# Altium PCB Mega_pcb.PcbDoc
Units mm, origin at the board's own origin, x right, y up, seen from the top; angles counter-clockwise.
Board outline 100.2 x 100.08 mm, 2 copper layers (Top Layer, Bottom Layer); 30 components, 31 nets, 110 pads, 12 vias.
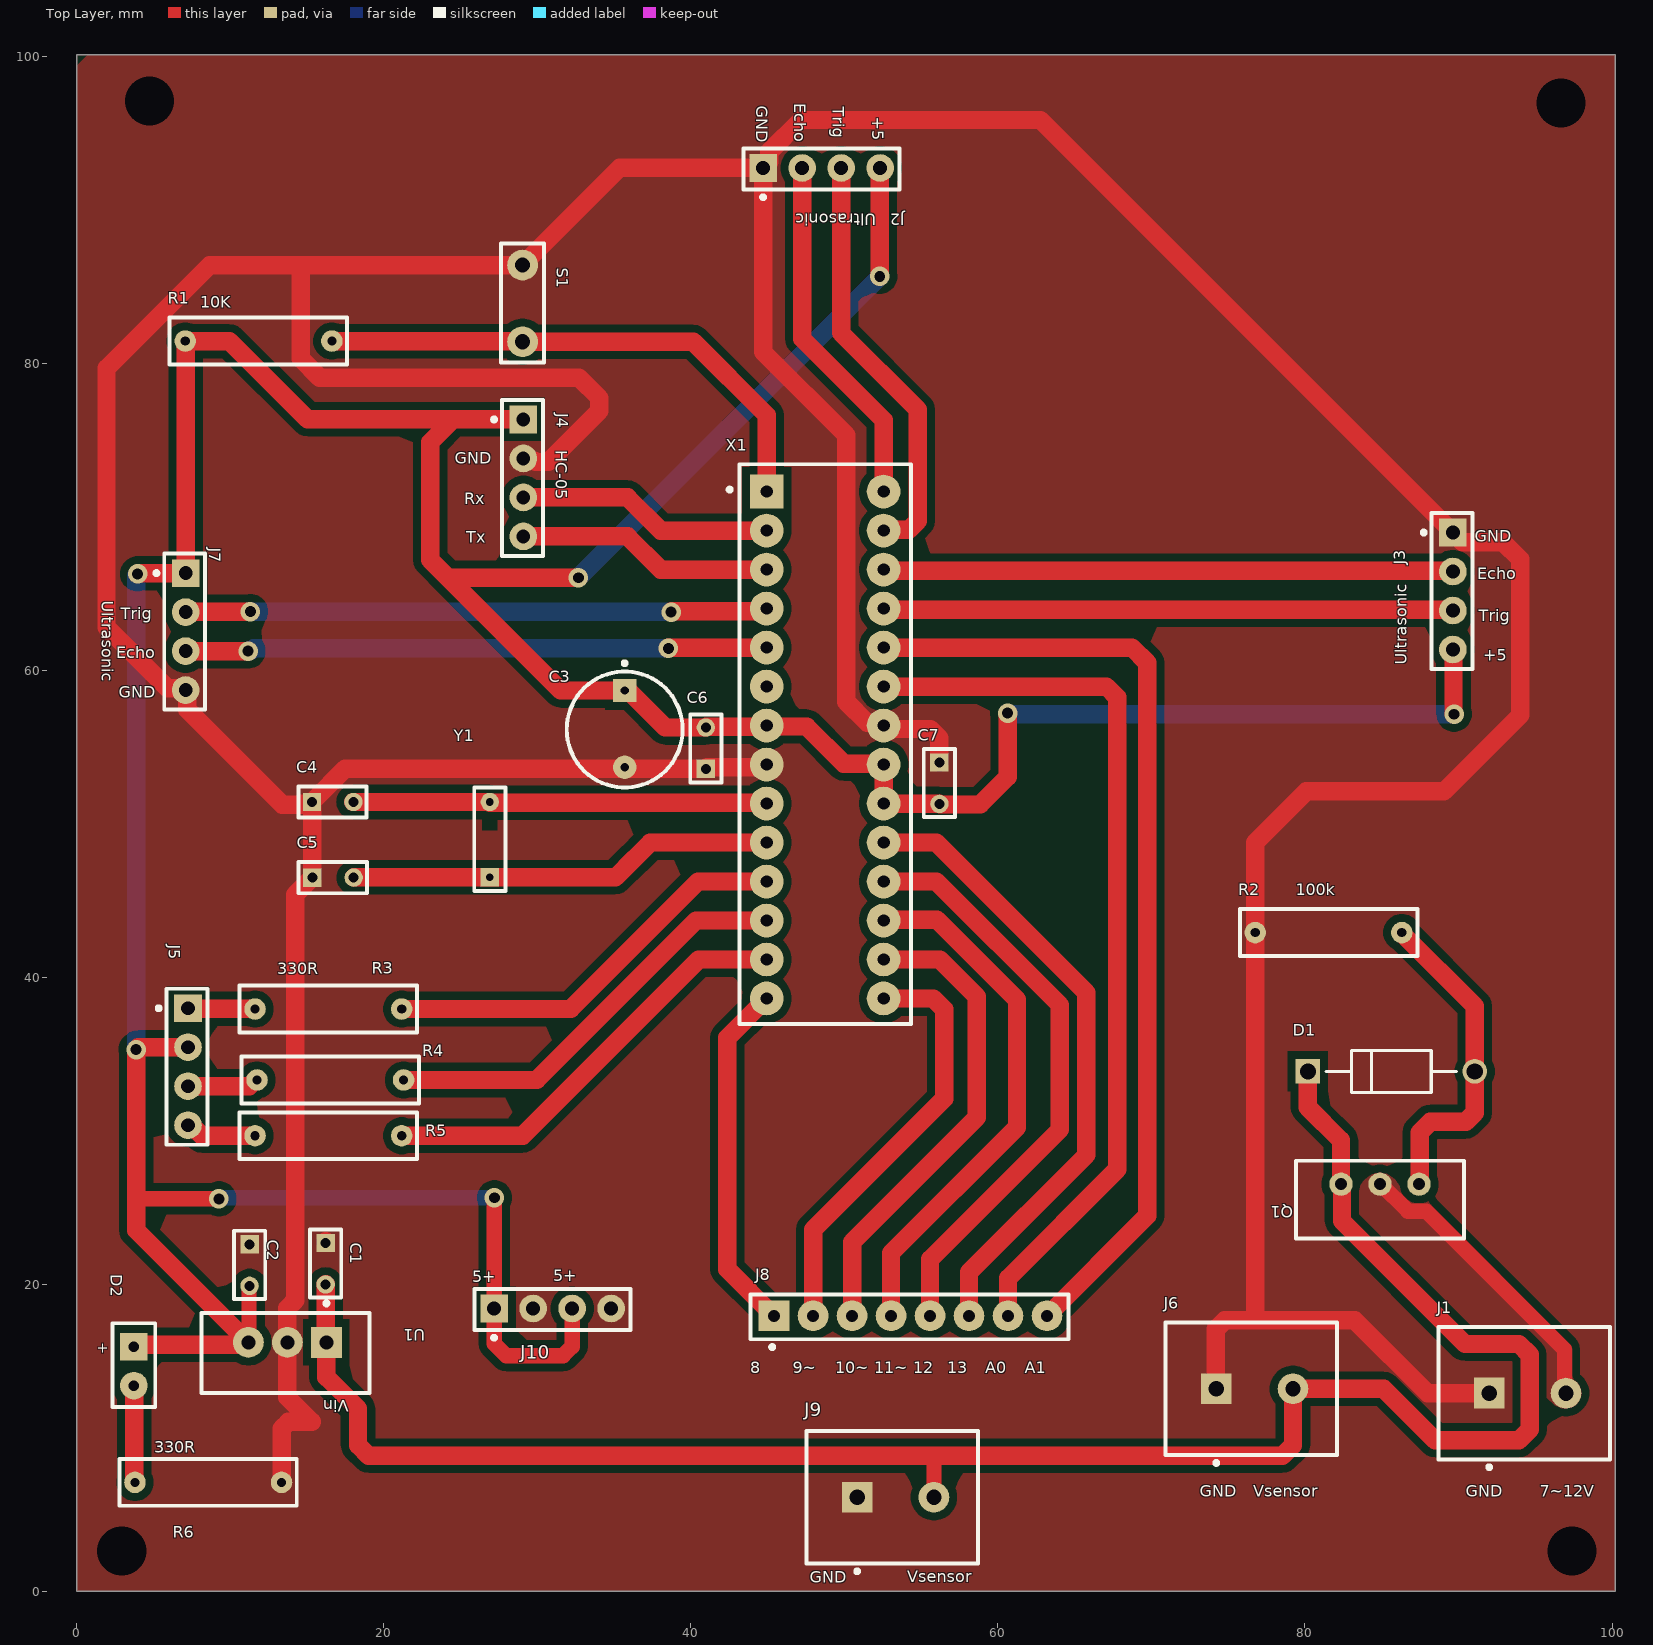
[diagram p0: Top Layer view]
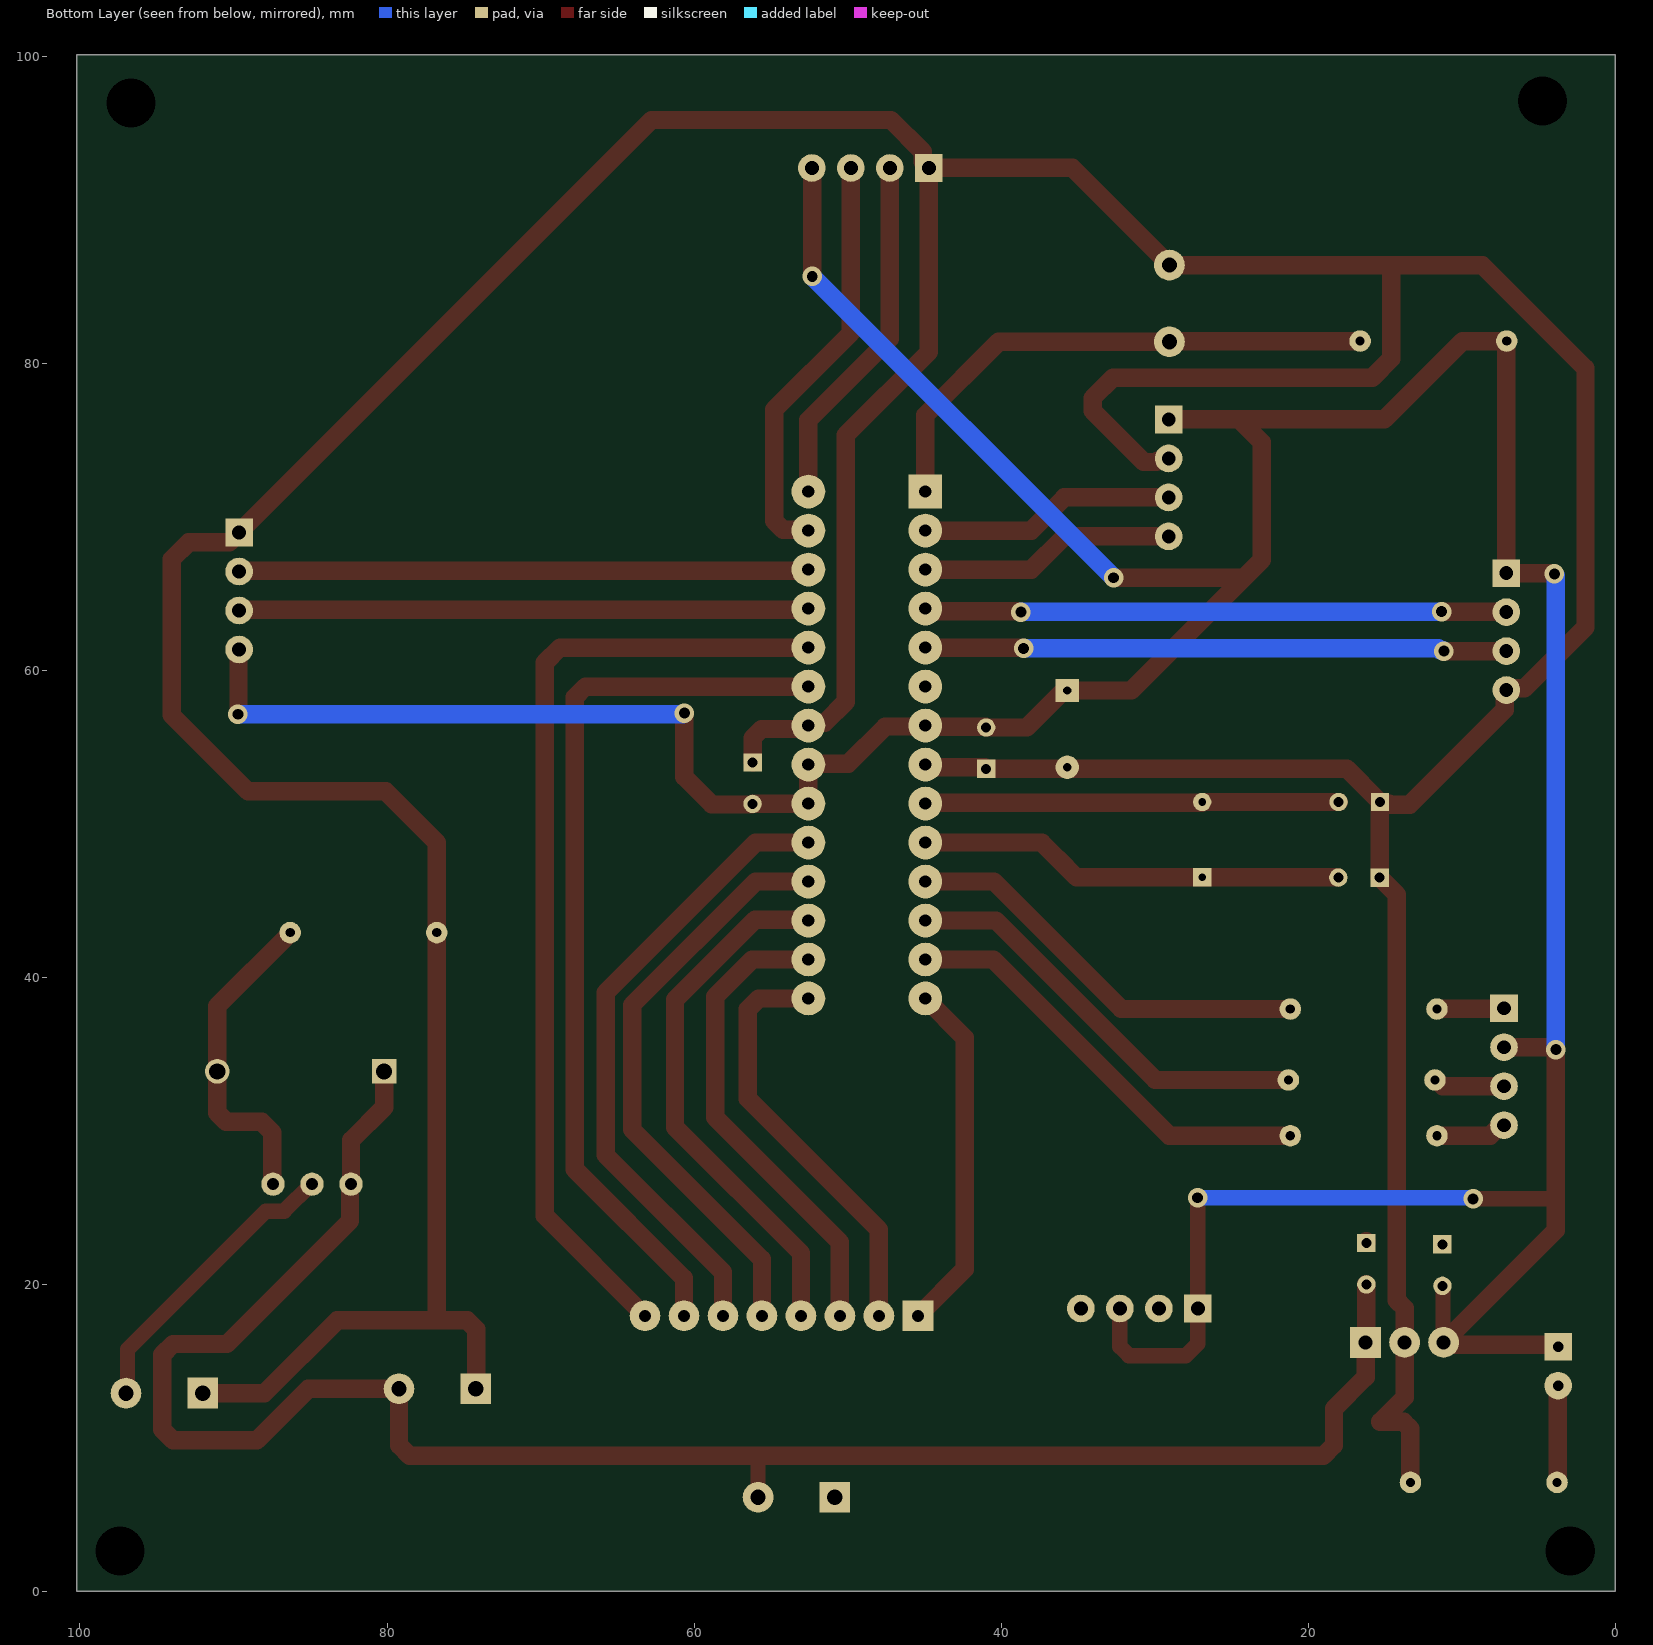
[diagram p1: Bottom Layer view, seen from below]
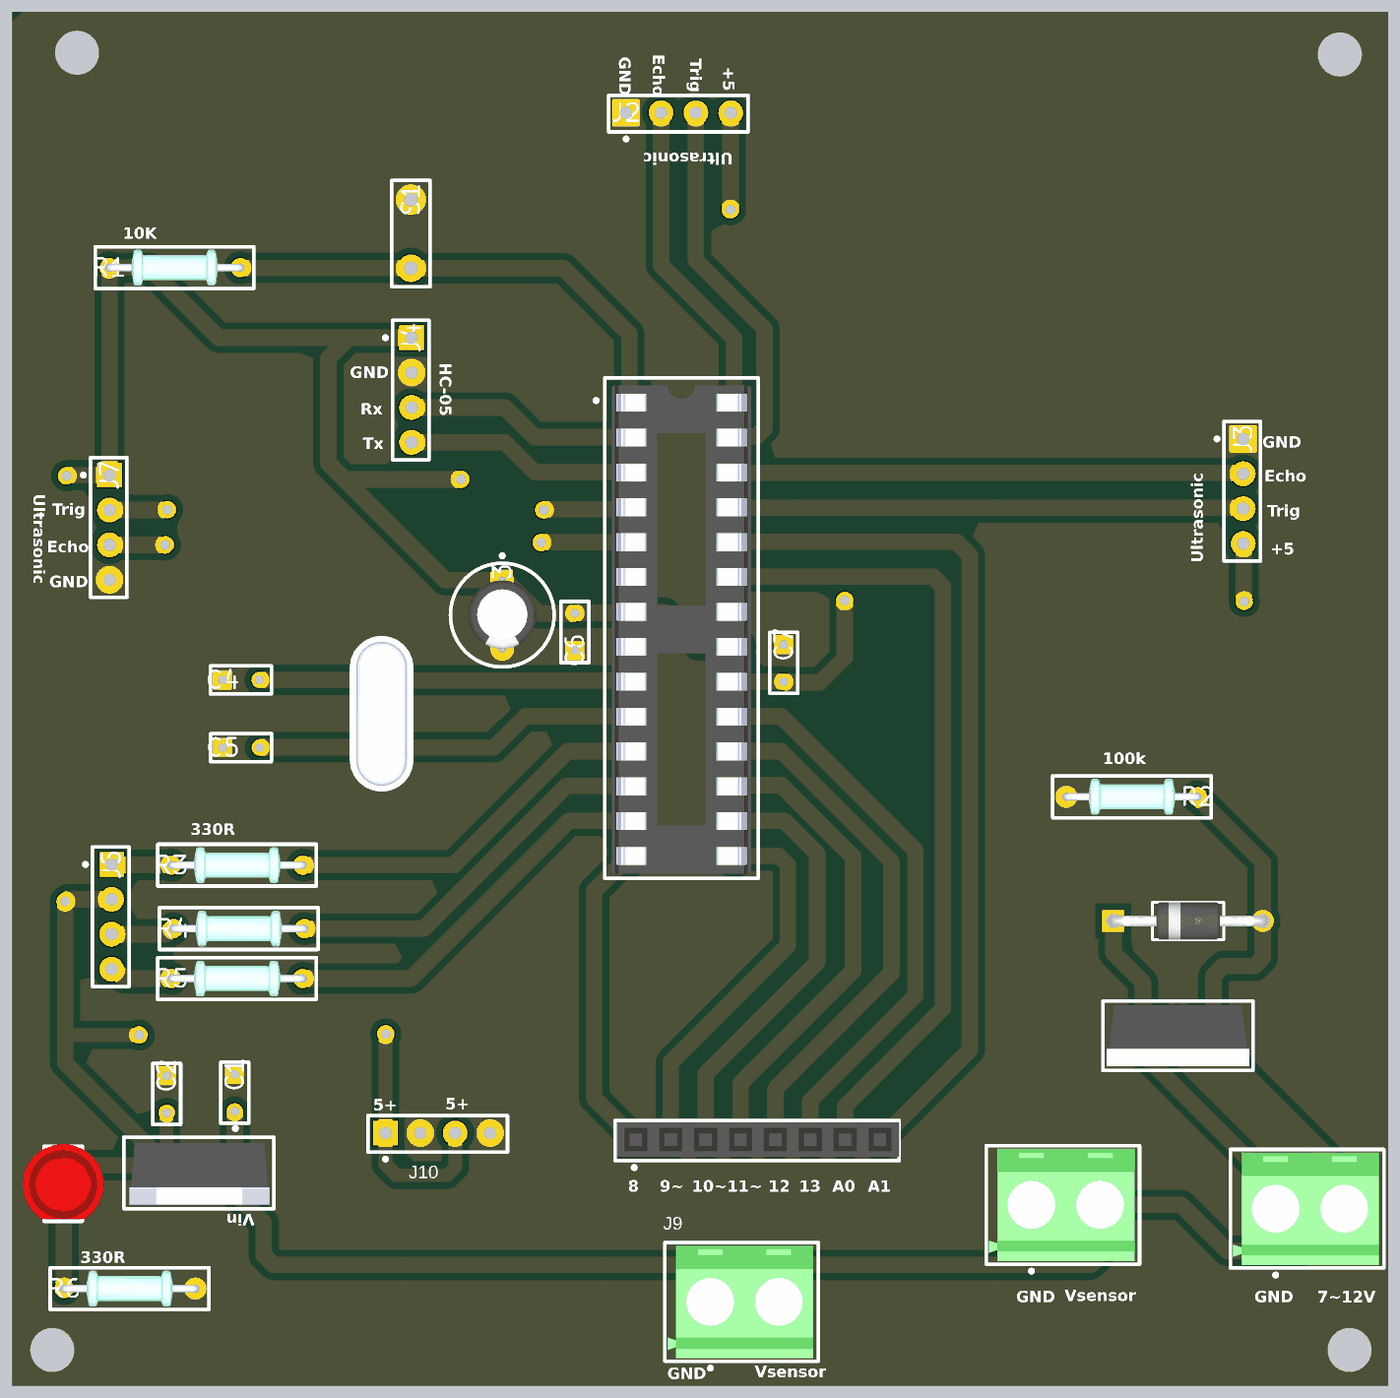
[diagram p2: 3D render of the assembled board from above, using the file's embedded part models]

## Layer stack, top to bottom
Top Solder: solder mask 0.0102, Solder Resist, Dk 3.5
Top Layer: signal copper 0.0356
Dielectric 1: dielectric 0.32, FR-4, Dk 4.8
Bottom Layer: signal copper 0.0356
Bottom Solder: solder mask 0.0102, Solder Resist, Dk 3.5

## Board outline
0,0 100.203,0 100.203,100.076 0,100.076

## Design rules (kind name [scope] priority, off if disabled: settings)
Clearance [All] p1: gap=0.5 ignorepadtopadclearanceinfootprint=TRUE
PlaneConnect [All] p1: planeconnectstyle=Direct reliefexpansion=0.508 reliefentries=4 reliefconductorwidth=0.254 reliefairgap=0.254
PolygonConnect [All] p1: connectstyle=Direct reliefconductorwidth=0.254 reliefentries=4 polygonreliefangle="90 Angle" airgapwidth=0.254
RoutingVias [All] p1: holewidth=0.711 width=1.27 viastyle="Through Hole" minholewidth=0.711 minwidth=1.27 maxholewidth=0.711 maxwidth=1.27
SolderMaskExpansion [All] p1: expansion=0.102 istentingtop=FALSE
SupplyNets "Schematic Supply Nets_16" [InNet('+5')] p1: voltage=0.000
SupplyNets "Schematic Supply Nets_12" [InNet('GND')] p2: voltage=0.000
SupplyNets "Schematic Supply Nets_7" [InNet('Vin')] p3: voltage=0.000
UnRoutedNet [All] p1: checkbadconnections=TRUE
Width [All] p1: maxlimit=1.2 minlimit=1 preferedwidth=1
28 further rules are at their usual default settings.

## Components (designator, comment, footprint, x,y, rotation, side; value= is the part's Value field where it differs from the comment)
C1 "0.33uF" "Capacitor 100nF THT" 16.205,22.682 r270 top
C2 "100nF" "Capacitor 100nF THT" 11.252,22.588 r270 top
C3 "10uF" "Pol cap 10uF" 35.687,58.67 r270 top
C4 "22pF" "Capacitor 22pF THT" 15.316,51.41 r0 top
C5 "22pF" "Capacitor 22pF THT" 15.334,46.482 r0 top
C6 "100nF" "Capacitor 100nF THT" 40.97,53.561 r90 top
C7 "100nF" "Capacitor 100nF THT" 56.185,53.983 r270 top
D1 "10V" FP-017AH-MFG 85.623,33.858 r0 top
D2 "LED" "Green Led 5mm" 3.708,15.926 r270 top
J1 "Teminal block 2pins" "Terminal Block" 92.003,12.903 r0 top
J2 "Pin Headers 4 pins" "Pin Headers 4 pins" 44.704,92.71 r0 top
J3 "Pin Headers 4 pins" "Pin Headers 4 pins" 89.637,68.961 r270 top
J4 "Pin Headers 4 pins" "Pin Headers 4 pins" 29.083,76.327 r270 top
J5 "Pin Headers 4 pins" "Pin Headers 4 pins" 7.239,37.973 r270 top
J6 "Teminal block 2pins" "Terminal Block" 74.219,13.183 r0 top
J7 "Pin Headers 4 pins" "Pin Headers 4 pins" 7.087,66.319 r270 top
J8 "Pin Headers 8 Pin Female" "Pin Headers 8 Pin Female" 45.415,17.932 r0 top
J9 "Teminal block 2pins" "Terminal Block" 50.829,6.121 r0 top
J10 "Pin Headers 4 pins" "Pin Headers 4 pins" 27.178,18.415 r0 top
Q1 "IRF9530" IRF9530 87.427,26.518 r180 top
R1 "10k" "Carbon Resistor 1k Ohm 0.25W" 7.061,81.432 r0 top
R2 "100k" "Carbon Resistor 10k Ohm 0.25W" 86.309,42.901 r180 top
R3 "330R" "Carbon Resistor 1k Ohm 0.25W" 11.608,37.922 r0 top
R4 "330R" "Carbon Resistor 1k Ohm 0.25W" 11.735,33.299 r0 top
R5 "330R" "Carbon Resistor 1k Ohm 0.25W" 11.608,29.667 r0 top
R6 "330R" "Carbon Resistor 1k Ohm 0.25W" 3.785,7.087 r0 top
S1 "Push Button" "PushButton 2 pins" 29.032,86.385 r270 top
U1 "Regulator 7805" "Regulator LM7805 THT" 16.256,16.205 r180 top
X1 "28Pins ic holder" "28 pins ic holder" 44.933,71.628 r0 top
Y1 "16MHz" "Crystal 16MHz" 26.899,46.507 r90 top

## Footprints (in the part's own frame and the unit in brackets; to place one, negate y for a bottom-side part, rotate by r counter-clockwise, add the part's x,y. Pads: shape width x height; smd on the part's side, far side on the other; paste and mask are expansions set on the pad)
"28 pins ic holder" [mm]
  rect 2.2x2.2 hole 0.8: 1(0,0)
  round 2.2 hole 0.8: 2(0,-2.54) 3(0,-5.08) 4(0,-7.62) 5(0,-10.16) 6(0,-12.7) 7(0,-15.24) 8(0,-17.78) 9(0,-20.32) 10(0,-22.86) 11(0,-25.4) 12(0,-27.94) 13(0,-30.48) 14(0,-33.02) 15(7.62,-33.02) 16(7.62,-30.48) 17(7.62,-27.94) 18(7.62,-25.4) 19(7.62,-22.86) 20(7.62,-20.32) 21(7.62,-17.78) 22(7.62,-15.24) 23(7.62,-12.7) 24(7.62,-10.16) 25(7.62,-7.62) 26(7.62,-5.08) 27(7.62,-2.54) 28(7.62,0)
  silkscreen extent -2.54,-34.67 9.4,1.78, body extent -1.28,-34.32 8.88,1.24, height 6.7
"Capacitor 22pF THT" [mm]
  rect 1.2x1.2 hole 0.65: 1(0,0)
  round 1.2 hole 0.65: 2(2.7,0)
  silkscreen extent -0.89,-1.02 3.56,1.02
"Capacitor 100nF THT" [mm]
  rect 1.2x1.2 hole 0.65: 1(0,0)
  round 1.2 hole 0.65: 2(2.7,0)
  silkscreen extent -0.89,-1.02 3.56,1.02
"Carbon Resistor 1k Ohm 0.25W" [mm]
  round 1.4 hole 0.6: 1(0,0) 2(9.55,0)
  silkscreen extent -1.02,-1.52 10.54,1.52, body extent -0.28,-1.3 9.82,1.3, height 3.59
"Carbon Resistor 10k Ohm 0.25W" [mm]
  round 1.4 hole 0.6: 1(0,0) 2(9.55,0)
  silkscreen extent -1.02,-1.52 10.54,1.52, body extent -0.28,-1.3 9.82,1.3, height 3.59
"Crystal 16MHz" [mm]
  rect 1.2x1.2 hole 0.5: 1(0,0)
  round 1.2 hole 0.5: 2(4.9,0)
  silkscreen extent -0.89,-1.02 5.84,1.02, body extent -3.24,-2.32 8.11,2.32, height 3.5
FP-017AH-MFG [mm]
  rect 1.6x1.6 hole 1.05 paste-2539.97 mask+0: 1(-5.438,0)
  round 1.6 hole 1.05 paste-2539.97 mask+0: 2(5.438,0)
  silkscreen extent -4.24,-1.36 4.24,1.36, body extent -6.34,-1.46 6.34,1.46, height 0.25
"Green Led 5mm" [mm]
  rect 1.8x1.8 hole 0.7: 1(0,0)
  round 1.8 hole 0.7: 2(2.54,0)
  silkscreen extent -1.52,-1.4 3.94,1.4, body extent -1.68,-2.95 3.75,2.95, height 12.1
IRF9530 [mil]
  round 60 hole 30: 1(0,0) 2(100,0) 3(200,0)
  silkscreen extent -115,-60 315,140, body extent -105,-48 305,128, height 760
"Pin Headers 4 pins" [mm]
  rect 1.8x1.8 hole 0.9: 1(0,0)
  round 1.8 hole 0.9: 2(2.54,0) 3(5.08,0) 4(7.62,0)
  silkscreen extent -1.27,-2.03 8.89,1.27
"Pin Headers 8 Pin Female" [mm]
  rect 2x2 hole 0.8: 1(0,0)
  round 2 hole 0.8: 2(2.54,0) 3(5.08,0) 4(7.62,0) 5(10.16,0) 6(12.7,0) 7(15.24,0) 8(17.78,0)
  silkscreen extent -1.52,-2.16 19.18,1.4, body extent -1.4,-1.25 19.18,1.25, height 8.65
"Pol cap 10uF" [mil]
  rect 60x60 hole 21.65: 1(0,0)
  round 60 hole 21.65: 2(196.85,0)
  silkscreen extent -75,-149 249,149, body extent -10,-98 207,98, height 492
"PushButton 2 pins" [mm]
  round 2 hole 1: 1(0,0) 2(5,0)
  silkscreen extent -1.4,-1.4 6.35,1.4
"Regulator LM7805 THT" [mm]
  rect 2x2 hole 0.9: 1(0,0)
  round 2 hole 0.9: 2(2.54,0) 3(5.08,0)
  silkscreen extent -2.79,-2.67 8.13,3.3, body extent -2.48,-1.49 7.72,3.01, height 19.22
"Terminal Block" [mm]
  rect 2x2 hole 1: 1(0,0)
  round 2 hole 1: 2(5,0)
  silkscreen extent -3.3,-4.95 7.87,4.32, body extent -3.1,-4.1 7.5,4.1, height 10

## Part data
C1 C2 C6 C7: library part "Capacitor 100nF THT"
C3: library part "Capacitor (POL) 10uF THT"
C4 C5: library part "Capacitor 22pF THT"
D1: library part CMP-00278-84408782-1, "1N4740ATR 1N4740 Series 1 W 10 V 10 uA Through Hole Zener Diode - DO-41", Manufacturer Lifecycle Status=ACTIVE, Max Operating Temperature=200°C, Max Power Dissipation=1W, Max Reverse Leakage Current=10µA, Min Operating Temperature=-65°C, Output Current=1A, Test Current=25mA, Tolerance=5%, Contact Plating=Tin, Diameter=2.72mm, Element Configuration=Single, ESD Protection=No, Height=6.35mm, Impedance=7Ω, Lead Free="Lead Free", Length=5.2mm, Lifecycle Status=Production, Material=Glass, Mount="Through Hole", NexarPartId=84408782, Number of Pins=2, Packaging="Cut Tape", Peak Reverse Current=10µA, Power Dissipation=1W, Power Rating=1W, Radiation Hardening=No, REACH SVHC="No SVHC", RoHS=Compliant, Schedule B="8541100050, 8541100050", Voltage Rating (DC)=10V, Voltage Tolerance=5%, Weight=245mg, Width=6.35mm, Working Voltage=10V, Zener Current=25mA, Zener Voltage=10V
D2: library part "Green LED"
R1 R6: library part "Resistor THT"
R2: library part "Resistor 10k Ohms THT"
R3 R4 R5: library part "Resistor tht"
Y1: library part "16MHz Crystal"

## Free pads (board coordinates)
  round 1.524 hole 3.2: 2(2.921,2.616) 2(4.724,97.079) 2(96.672,96.952) 2(97.384,2.616)

## Via types
v1: diameter 1.27, hole 0.711, Top Layer to Bottom Layer, 12 vias

## Nets (pads, with @x,y where several pads share a name; then routed paths per layer and width w, separated by ;. In a path a pad name is that pad's centre, name@x,y a point inside that pad or via, vN(x,y) a via of type N, cw(c..) or ccw(c..) an arc to the next point about the centre after c; other vN are vias at no path point)
+5: C2.2 C3.1 C6.2 C7.2 D2.1 J2.4 J3.4 J4.1 J5.2 J7.1 J10.1 J10.3 R1.1 U1.3 X1.7 X1.20 X1.21 | length 288.3
  Top Layer w1: 3.858,25.654 3.959,25.552 v1(9.246,25.552) ; U1.3 11.214,16.243 11.214,19.812 11.252,19.85 C2.2 ; v1(27.203,25.629) 27.191,25.616 27.191,18.428 J10.1 27.178,16.129 27.965,15.342 31.672,15.342 32.258,15.927 J10.3
  Top Layer w1.2: D2.1 3.848,16.066 11.036,16.066 U1.3 3.858,23.524 3.858,25.654 v1(3.858,35.281) 4.01,35.433 J5.2 ; v1(3.962,66.269) 3.981,66.269 4.032,66.319 J7.1 7.087,81.407 R1.1 9.931,81.432 15.037,76.327 24.511,76.327 ; J4.1 24.511,76.327 ; v1(32.664,66.015) 24.536,66.015 24.359,65.837 ; C3.1 31.525,58.67 24.359,65.837 ; C3.1@35.801,58.785 38.325,56.261 C6.2 41.008,56.299 44.844,56.299 X1.7 44.993,56.328 47.533,56.328 49.953,53.908 52.493,53.908 X1.21 X1.20 52.565,51.295 56.172,51.295 C7.2 56.223,51.244 58.839,51.244 60.63,53.035 v1(60.63,57.193) ; v1(52.299,85.649) 52.311,85.661 52.311,92.697 J2.4 ; J3.4 89.675,61.303 89.675,57.163 v1(89.713,57.125) ; 24.359,65.837 23.012,67.183 23.012,74.828 24.511,76.327
  Bottom Layer w1: v1(9.246,25.552) 9.322,25.629 v1(27.203,25.629)
  Bottom Layer w1.2: v1(3.858,35.281) 3.858,66.145 3.962,66.25 v1(3.962,66.269) ; v1(32.664,66.015) v1(52.299,85.649) ; v1@60.653,57.17 60.662,57.18 60.717,57.125 v1(89.713,57.125)
B: R5.2 X1.13 | length 28.5
  Top Layer w1.2: R5.2 29.032,29.667 40.513,41.148 X1.13
Current: J8.8 X1.24 | length 62.8
  Top Layer w1.2: X1.24 68.731,61.468 69.724,60.474 69.724,24.462 J8.8
Echo1: J7.3 X1.5 | length 37.9
  Top Layer w1.2: J7.3 v1(11.151,61.239) ; v1(38.532,61.417) 38.557,61.443 44.907,61.443 X1.5
  Bottom Layer w1.2: v1(11.151,61.239) 11.17,61.239 11.221,61.291 11.402,61.291 11.528,61.417 v1(38.532,61.417)
Echo2: J3.2 X1.26 | length 37.1
  Top Layer w1.2: X1.26 52.616,66.484 89.573,66.484 J3.2
Echo3: J2.2 X1.28 | length 23.3
  Top Layer w1.2: J2.2 47.244,81.595 52.553,76.286 X1.28
EN1: J8.3 X1.16 | length 31.2
  Top Layer w1.2: J8.3 50.495,22.733 58.623,30.861 58.623,38.735 56.21,41.148 X1.16
EN2: J8.4 X1.17 | length 34.9
  Top Layer w1.2: X1.17 52.603,43.739 56.024,43.739 61.239,38.523 61.239,30.226 53.035,22.022 J8.4
G: R4.2 X1.12 | length 28
  Top Layer w1.2: R4.2 29.947,33.299 40.335,43.688 X1.12
GND: C1.1 C2.1 C3.2 C4.1 C5.1 C6.1 C7.1 J1.1 J2.1 J3.1 J4.2 J6.1 J7.4 J9.1 J10.2 J10.4 pad.2 R2.2 R6.2 S1.1 U1.2 X1.8 X1.22 | length 389.6
  Top Layer w1.2: R6.2 13.335,10.579 13.779,11.024 15.316,11.024 13.716,12.624 13.716,18.44 14.224,18.948 14.224,45.372 C5.1 C4.1@15.334,51.392 ; C4.1@15.216,51.31 14.723,51.31 14.646,51.232 13.386,51.232 7.199,57.418 7.199,58.587 6.972,58.814 5.905,58.814 1.93,62.789 1.93,79.654 8.661,86.385 14.58,86.385 ; C4.1@15.416,51.51 17.477,53.57 35.587,53.57 C3.2 ; C1.1 C1.1@16.205,22.791 ; J4.2 29.236,73.634 29.802,73.634 29.879,73.557 30.707,73.557 34.041,76.891 34.041,77.719 32.711,79.049 15.82,79.049 14.58,80.289 14.58,86.385 ; C3.2@36.167,53.561 C6.1 41.07,53.661 44.746,53.661 X1.8 ; C7.1 56.185,55.577 55.599,56.163 52.778,56.163 52.361,56.579 51.472,56.579 50.114,57.937 50.114,75.311 44.704,80.721 J2.1 ; J6.1 74.193,13.208 74.193,17.067 74.779,17.653 76.759,17.653 ; J1.1 87.986,12.903 83.236,17.653 76.759,17.653 ; 14.58,86.385 S1.1 35.357,92.71 J2.1 ; J2.1 45.104,93.11 45.104,93.77 47.168,95.834 62.763,95.834 J3.1 90.277,68.321 92.918,68.321 94.031,67.208 94.031,57.074 89.052,52.095 80.086,52.095 76.759,48.768 R2.2 76.759,17.653
IN1: J8.2 X1.15 | length 27.7
  Top Layer w1.2: J8.2 47.955,23.546 56.49,32.08 56.49,37.905 55.787,38.608 X1.15
IN2: J8.1 X1.14 | length 23
  Top Layer w1.2: X1.14 42.367,36.043 42.367,20.98 J8.1
IN3: J8.5 X1.18 | length 39.2
  Top Layer w1.2: X1.18@52.782,45.998 X1.18 55.982,46.228 64.033,38.176 64.033,30.074 55.575,21.615 J8.5 J8.5@55.767,18.124
IN4: J8.6 X1.19 | length 41.5
  Top Layer w1.2: X1.19 55.98,48.768 65.761,38.987 65.761,28.423 58.115,20.777 J8.6
NetD1_2: D1.2 Q1.1 R2.1 | length 21.1
  Top Layer w1.2: R2.1@86.292,42.884 91.061,38.114 D1.2 91.061,31.167 90.476,30.582 88.173,30.582 87.47,29.879 Q1.1@87.47,26.561
NetD2_2: D2.2 R6.1 | length 6.3
  Top Layer w1.2: D2.2 3.747,13.347 3.747,7.125 R6.1
NetJ1_2: J1.2 Q1.2 | length 19.4
  Top Layer w1: Q1.2 84.935,26.518 86.697,24.756 87.893,24.756 96.901,15.748 96.901,13.005 J1.2
NetJ5_1: J5.1 R3.1 | length 4.4
  Top Layer w1.2: J5.1 7.264,37.948 11.582,37.948 R3.1
NetJ5_3: J5.3 R4.1 | length 4.7
  Top Layer w1.2: J5.3 11.22,32.893 11.627,33.299 R4.1
NetJ5_4: J5.4 R5.1 | length 4.7
  Top Layer w1.2: J5.4 7.455,30.353 8.141,29.667 R5.1
"Pin 9": C4.2 X1.9 Y1.2 | length 27
  Top Layer w1.2: C4.2 C4.2 26.898,51.409 Y1.2 26.937,51.369 44.871,51.369 X1.9
"Pin 10": C5.2 X1.10 Y1.1 | length 27.8
  Top Layer w1.2: C5.2@18.059,46.507 Y1.1 ; Y1.1@26.886,46.495 35.077,46.495 36.31,47.728 36.323,47.728 37.363,48.768 X1.10
R: R3.2 X1.11 | length 27.2
  Top Layer w1.2: R3.2 32.165,37.922 40.471,46.228 X1.11
Reset: R1.2 S1.2 X1.1 | length 35.3
  Top Layer w1.2: R1.2 16.635,81.409 29.009,81.409 S1.2 40.154,81.385 44.933,76.606 X1.1
Rx: J4.3 X1.2 | length 16.7
  Top Layer w1.2: J4.3 35.874,71.247 38.033,69.088 X1.2
Trig1: J7.2 X1.4 | length 38
  Top Layer w1.2: J7.2 7.099,63.792 11.29,63.792 v1(11.303,63.805) ; v1(38.71,63.779) 38.761,63.831 44.756,63.831 X1.4
  Bottom Layer w1.2: v1(11.303,63.805) 11.316,63.792 38.697,63.792 v1(38.71,63.779)
Trig2: J3.3 X1.25 | length 37.1
  Top Layer w1.2: X1.25 52.616,63.944 89.573,63.944 J3.3
Trig3: J2.3 X1.27 | length 27.6
  Top Layer w1.2: J2.3 49.784,81.966 54.788,76.962 54.788,69.725 54.202,69.139 52.603,69.139 X1.27
Tx: J4.4 X1.3 | length 16.7
  Top Layer w1.2: J4.4 35.874,68.707 38.033,66.548 X1.3
Vin: C1.2 D1.1 J6.2 J9.2 Q1.3 U1.1 | length 127.6
  Top Layer w1: J9.2 55.829,8.814
  Top Layer w1.2: U1.1@16.205,16.256 C1.2 ; U1.1 16.256,13.945 18.313,11.887 18.313,9.517 19.016,8.814 55.829,8.814 78.516,8.814 79.219,9.517 J6.2 85.122,13.183 88.475,9.83 93.937,9.83 94.64,10.533 94.64,15.401 93.937,16.104 90.424,16.104 82.409,24.119 82.409,26.456 Q1.3 82.347,29.362 80.185,31.524 D1.1
"Voltage ": J8.7 X1.23 | length 58.7
  Top Layer w1.2: X1.23 67.064,58.928 67.767,58.225 67.767,27.483 60.655,20.371 J8.7
pads on no net: X1.6

## Polygon pours and split planes (outlines as drawn)
NetJ1_2 on Top Layer "NETJ1_2_L01_P001" (solid, remove dead copper, pour order 1): 83.541,27.305 83.541,23.063 97.561,9.042 102.946,14.427 102.946,18.085 96.876,18.085 86.03,28.931
GND on Top Layer "GND_L01_P000" (solid, remove dead copper, pour order 0): 0,100.076 0,0 100.203,0 100.203,100.051

## Silkscreen, mask and mechanical layers (free items; w line width, h text height)
Top Overlay:
  text "Echo" at 46.457,96.931 h1.3 r270
  text "GND" at 43.983,96.761 h1.3 r270
  text "Trig" at 48.967,96.687 h1.3 r270
  text "+5" at 51.563,96.038 h1.3 r270
  text "Ultrasonic" at 52.059,89.991 h1.3 r180
  text "10K" at 8.037,83.327 h1.3
  text "HC-05" at 30.927,74.324 h1.3 r270
  text "GND" at 24.626,73.193 h1.3
  text "Rx" at 25.235,70.547 h1.3
  text "GND" at 91.072,68.113 h1.3
  text "Tx" at 25.363,68.033 h1.3
  text "Echo" at 91.207,65.66 h1.3
  text "Ultrasonic" at 1.347,64.53 h1.3 r270
  text "Trig" at 2.856,63.039 h1.3
  text "Trig" at 91.324,62.937 h1.3
  text "Echo" at 2.561,60.504 h1.3
  text "Ultrasonic" at 86.893,60.362 h1.3 r90
  text "+5" at 91.617,60.351 h1.3
  text "GND" at 2.731,57.953 h1.3
  text "100k" at 79.409,45.075 h1.3
  text "330R" at 13.041,39.919 h1.3
  text "5+" at 31.027,19.929 h1.3
  text "5+" at 25.769,19.853 h1.3
  text "8" at 43.854,13.935 h1.3
  text "9~" at 46.648,13.935 h1.3
  text "10~" at 49.391,13.935 h1.3
  text "11~" at 51.956,13.935 h1.3
  text "12" at 54.471,13.935 h1.3
  text "13" at 56.706,13.935 h1.3
  text "A0" at 59.17,13.935 h1.3
  text "A1" at 61.761,13.935 h1.3
  text "Vin" at 17.702,12.714 h1.3 r180
  text "330R" at 5.04,8.753 h1.3
  text "GND" at 73.14,5.883 h1.3
  text "Vsensor" at 76.636,5.883 h1.3
  text "GND" at 90.488,5.883 h1.3
  text "7~12V" at 95.293,5.883 h1.3
  text "Vsensor" at 54.08,0.328 h1.3
  text "GND" at 47.74,0.295 h1.3

## Text inside footprints (layer, text, board x,y; h text height)
D2: Top Overlay "+" at 1.406,16.207 h0.7 r270